# Altium PCB Cold_chain_Logger.PcbDoc (part 3 of 3)
Units mm, origin at the board's own origin, x right, y up, seen from the top; angles counter-clockwise.
Board outline 66 x 99 mm, 4 copper layers (Top Layer, GND Layer, 3.3V layer, Bottom Layer), stack 1.586 mm thick; 118 components, 83 nets, 435 pads, 406 vias.
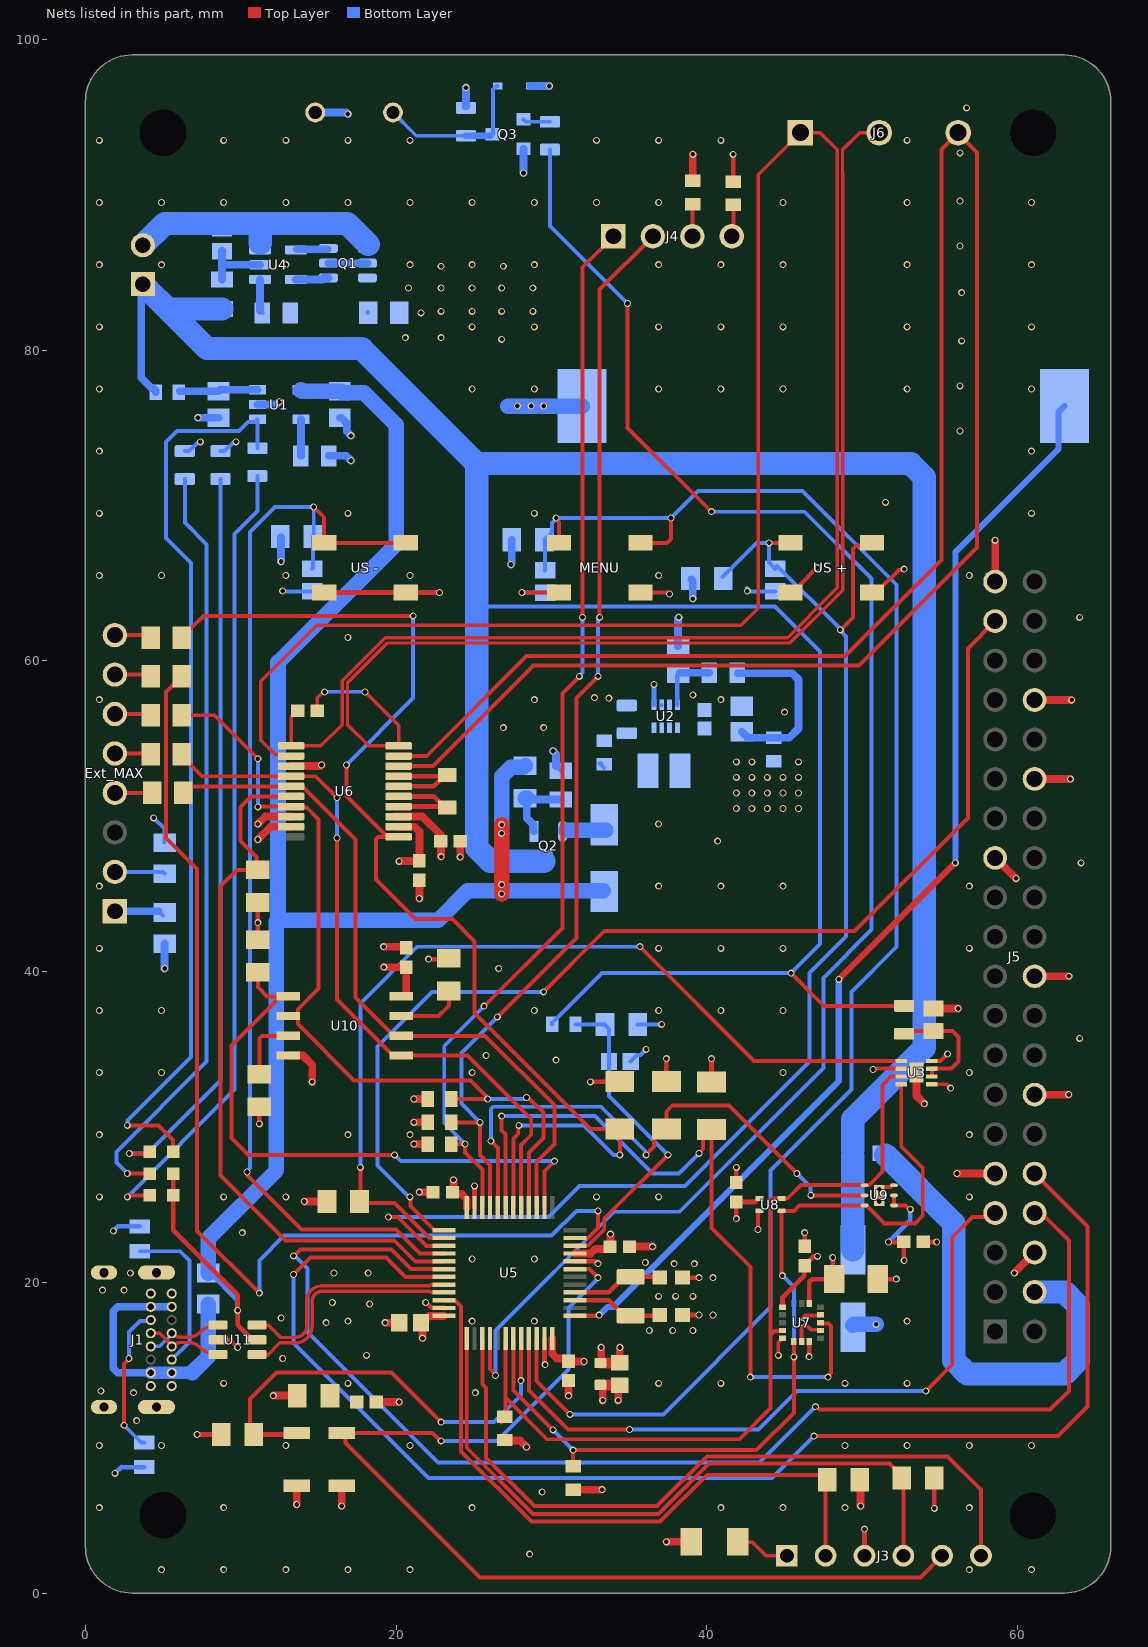
[diagram p4: the nets of this part, all layers, seen from the top]

## Via types
v1: diameter 0.45, hole 0.3, Top Layer to Bottom Layer, tented both sides, 403 vias
v2: diameter 0.5, hole 0.3, Top Layer to Bottom Layer, 2 vias
v3: diameter 0.45/0.45 (per signal layer), hole 0.3, Top Layer to Bottom Layer, tented both sides, 1 vias

## Nets (pads, with @x,y where several pads share a name; then routed paths per layer and width w, separated by ;. In a path a pad name is that pad's centre, name@x,y a point inside that pad or via, vN(x,y) a via of type N, cw(c..) or ccw(c..) an arc to the next point about the centre after c; other vN are vias at no path point)
3.3V: Boot0.2 C6.2 C7.2 C8.1 C9.2 C10.2 C14.2 C16.1 C17.1 C18.2 C20.1 C21.1 C23.1 C24.1 D2.2 LS.2 R3.2 R10.2 R11.2 R14.1 R15.2 R17.2 R21.2 R22.2 R23.2 R24.2 R29.2 R30.1 R31.2 R35.2 R36.2 R37.2 R45.1 R47.2 R54.2 R55.2 R56.2 R57.2 R65.2 U2.5 U5.9 U5.24 U5.36 U5.48 U6.2 U6.3 U7.1 U7.8 U7.14 U8.3 U9.1 U9.2 U10.8 | length 83.3
  Top Layer w0.254: U10.8@20.345,38.405 20.523,38.405 U10.8@20.662,38.544 ; U5.36@23.071,17.837 U5.36@23.084,17.85 ; R30.1@34.375,32.9 R30.1@34.4,32.925 ; U7.14@46.6,18.625 U7.14@46.6,18.675 ; R24.2@49.85,7.3 R24.2@49.9,7.25 ; U9.1@52.05,24.95 U9.2@52.05,25.6 ; U9.1@52.173,24.95 52.797,24.95 53.047,24.7 v1(53.1,24.7)
  Top Layer w0.3: R36.2@11.1,42.05 v1(11.1,43.15) 11.1,44.35 R65.2@11.2,44.45 ; v1(11.2,30.2) R35.2@11.2,31.3 ; v1(22.1,40.8) 23.35,40.8 R37.2@23.4,40.85 ; v1(32.5,32.9) R30.1@34.375,32.9 ; R47.2@37.4,32.925 v1(37.4,34.4) ; R45.1@40.3,32.9 v1(40.3,34.4) ; v1(41.9,24.1) C23.1@41.9,25.175 43.124,25.175 43.3,25.35 43.3,25.4 U8.3@43.4,25.4 ; U7.1@44.875,18.4 44.875,19.025 46.265,20.415 C21.1@46.265,21.039 ; C21.1@46.3,21.075 46.3,21.096 46.875,21.671 v1(47.121,21.671) ; v1(46.587,15.212) 46.587,16.163 U7.8@46.6,16.175 ; U7.14@46.6,18.675 46.6,20.024 46.776,20.2 C20.1@48.2,20.2 ; v1(48.1,21.6) 48.1,20.393 C20.1@48.193,20.3 ; v1(51.7,22.6) C24.1@52.675,22.6 52.687,22.587 52.687,21.413 v1(52.7,21.4)
  Top Layer w0.5: v1(12.1,12.708) 13.3,12.708 13.65,12.358 R23.2@13.65,12.3 ; v1(13.6,5.7) Boot0.2@13.6,6.9 ; v1(14.1,25.2) R14.1@15.55,25.2 ; v1@19.2,40.3 v1(19.213,40.287) C18.2@20.662,40.287 U10.8@20.662,38.544 ; U6.3@19.918,49.975 U6.3@20.16,49.975 21.7,49.975 22.9,48.775 v1(22.9,47.4) ; U6.2@20.16,49.325 21.207,49.325 21.5,49.032 C16.1@21.5,47.125 20.225,47.125 v1(20.2,47.1) ; v1(21.15,28.9) R11.2@22.05,28.9 ; v1(21.15,30.3) R10.2@22.05,30.3 ; v1(21.15,31.8) R29.2@22.05,31.8 ; C10.2@21.6,17.4 21.7,17.3 v1(21.7,16.4) ; C10.2@21.937,17.663 22.112,17.837 U5.36@23.071,17.837 ; C7.2@23.625,25.8 23.818,25.8 23.924,25.694 24.207,25.694 24.55,25.351 U5.24@24.55,24.816 ; C7.2@23.7,26.037 v1(23.7,26.6) ; R21.2@27,9.85 27.037,9.813 27.987,9.813 v1(28.4,9.4) ; U5.48@30.05,16.384 30.05,15.396 30.343,15.103 30.944,15.103 31.1,14.947 C8.1@31.1,14.925 ; C8.1@31.325,14.9 v1(32.1,14.9) ; R22.2@31.4,6.65 v1(33.25,6.65) ; U5.9@31.516,21.85 31.527,21.86 32.535,21.86 32.819,22.144 33.618,22.144 C14.2@33.775,22.3 ; v1(33.2,15.8) 33.2,14.825 C6.2@33.212,14.813 ; C14.2@33.796,22.3 33.8,22.304 v1(33.8,23.1) ; C9.2@34.4,14.825 v1(34.4,15.8) ; v1(37.4,3.3) R15.2@39,3.3 ; R17.2@39.1,90.9 v1(39.1,92.6) ; v1(49.9,5.6) R24.2@49.9,7.25
  Top Layer w0.7: C6.2@33.162,14.813 33.212,14.813 C9.2@34.188,14.813
  Bottom Layer w0.254: R56.2@12.55,68 R56.2@12.6,67.95 ; R57.2@24.445,95.645 R57.2@24.5,95.59 ; R55.2@38.95,65.3 R55.2@39,65.25
  Bottom Layer w0.3: U2.5@36.6,57.17 v1(36.6,58.485) ; v1(51.7,22.6) 53.1,24 v1(53.1,24.7)
  Bottom Layer w0.4: R57.2@24.445,95.645 R57.2@24.5,95.7
  Bottom Layer w0.5: v1(5.1,40.2) R31.2@5.1,41.8 ; v1(12.6,66.4) R56.2@12.6,67.95 ; LS.2@14.8,95.3 16.8,95.3 v1(16.9,95.2) ; R57.2@24.5,95.7 v1(24.5,96.9) ; v1(27.4,66.2) 27.45,66.25 R54.2@27.45,67.8 ; D2.2@28.655,97 v1(29.862,97) ; R55.2@39,65.25 39.1,65.15 v1(39.1,64)
  other v1: 41.9,50.5 42.9,50.5 43.9,50.5 44.9,50.5 45.9,50.5 41.9,51.5 42.9,51.5 43.9,51.5 44.9,51.5 45.9,51.5 41.9,52.5 42.9,52.5 43.9,52.5 44.9,52.5 45.9,52.5 41.9,53.5 42.9,53.5 45.9,53.5
5V: C3.2 D1.2 DS1.1 DS2.1 R12.2 R28.2 U1.4 U11.5@11.055,16.3 | length 114.6
  Top Layer w0.3: DS2.1@5.65,27 DS1.1@5.65,25.6 5.65,23.35 9.8,19.2 v1(9.8,18.2) 9.8,17.245 U11.5@10.745,16.3
  Top Layer w1: v1(26.8,45) v1(26.8,45.6) v1(26.8,48.9) v1(26.8,49.456)
  Bottom Layer w0.3: R12.2@7.9,20.6 8.025,20.6 9.771,18.854 9.771,18.229 v1(9.8,18.2)
  Bottom Layer w1: R12.2@7.9,20.6 7.9,22.8 12.3,27.2 12.3,43.2 12.4,43.3 ; U1.4@13.875,77.45 13.875,77.4 13.925,77.35 C3.2@16.375,77.35 16.475,77.35 16.575,77.25 17.95,77.25 20,75.2 20,67.5 12.4,59.9 12.4,43.3 ; 26.6,45.2 24.6,45.2 22.7,43.3 12.4,43.3 ; v1(26.8,45) v1(26.8,45.6) ; v1(26.8,48.9) v1(26.8,49.456) 26.8,52.564 27.386,53.15 28.2,53.15 R28.2@28.3,53.25 ; 27,45.2 D1.2@33.35,45.2
+_int: "US +.1" "US +.2" C26.2 R55.1 U5.27 | length 84.4
  Top Layer w0.254: v1(19.5,24.2) 19.506,24.194 20.106,24.194 21.95,22.35 U5.27@23.084,22.35 ; v1(44,67.6) 45.375,67.6 ; v1(48.6,62) 49.4,62.8 49.4,67.2 49.618,67.418 50.443,67.418 50.625,67.6
  Bottom Layer w0.254: v1(19.5,24.2) 29.8,24.2 31.8,26.2 38.6,26.2 46.6,34.2 46.6,39.9 48.965,42.265 48.965,61.582 48.6,61.947 v1(48.6,62) 48.6,62.05 C26.2@44.533,66.117 ; R55.1@41,65.4 43.2,67.6 v1(44,67.6) 44,66.323 44.398,65.925 C26.2@44.4,65.925
-_int: "US -.1" "US -.2" C27.2 R56.1 U5.28 | length 72.9
  Top Layer w0.254: v1(10.4,27.1) 10.438,27.062 10.438,26.862 13.9,23.4 20,23.4 21.55,21.85 U5.28@23.084,21.85 ; v1(14.7,69.9) 15.375,69.225 15.375,67.6 20.625,67.6
  Bottom Layer w0.254: v1(10.4,27.1) 10.4,27.147 10.6,27.347 10.6,68.3 12.2,69.9 v1(14.7,69.9) 14.7,68 R56.1@14.65,68 14.65,65.975 C27.2@14.6,65.925
B+: BAT.1 C28.1 Q2.3 R2.2 R9.2 R18.2 R43.1 R64.2 | length 215.8
  Top Layer w0.254: v1(45.417,39.9) 47.527,37.79 R9.2@52.7,37.79
  Bottom Layer w0.254: 25.2,63.5 44.4,63.5 47.3,60.6 47.3,41.783 v1(45.417,39.9) 33.25,39.9 30.05,36.7 R18.2@30.05,36.6
  Bottom Layer w0.5: 3.6,83.379 3.6,78.225 4.275,77.55 4.375,77.55 4.525,77.4 R2.2@4.525,77.3
  Bottom Layer w1.5: BAT.1@3.725,84.225 4.086,83.864 5.301,82.649 ; R43.1@8.8,82.649 5.301,82.649 ; 29.5,47.1 26.079,47.1 25.2,47.979 25.2,63.5 25.2,72.7 ; C28.1@49.4,22.1 R64.2@49.4,28.1 ; R64.2@49.4,28.5 49.4,30.5 54,35.1 54,71.821 53.121,72.7 25.2,72.7 ; 5.301,82.649 7.85,80.1 17.8,80.1 25.2,72.7
B-: BAT.2 C22.1 Q1.1 U4.3 | length 17.5
  Bottom Layer w0.254: C22.1@8.277,88.251 8.277,88.223 C22.1@8.675,87.825 ; 11.2,88.15 11.25,88.1
  Bottom Layer w1.5: BAT.2@3.7,86.75 5.1,88.15 8.277,88.15 11.2,88.15 16.85,88.15 Q1.1@18.2,86.8 ; 11.25,86.9 11.25,88.1
Battery: C15.2 R18.1 R20.2 U5.10 | length 20.8
  Top Layer w0.254: U5.10@31.516,22.35 31.529,22.363 32.363,22.363 33.4,23.4 33.4,24.1 v1(37.5,28.2)
  Bottom Layer w0.254: R18.1@31.55,36.6 R20.2@33.45,36.6 ; R20.2@33.4,36.6 33.7,36.3 C15.2@33.7,34.175 ; C15.2@33.7,34.2 33.7,32 v1(37.5,28.2)
Buzz: R58.2 U5.40 | length 106
  Top Layer w0.254: U5.40@26.05,16.384 26.05,14.403 26.4,14.053 v1(26.4,14) ; v1(34.9,83) 34.9,75 v1(40.3,69.6)
  Bottom Layer w0.254: v1(26.4,14) 26.4,16.9 34.044,24.544 38.244,24.544 47.5,33.8 47.5,39.6 50.6,42.7 50.6,65.3 46.3,69.6 v1(40.3,69.6) ; R58.2@29.9,92.91 29.9,88 v1(34.9,83)
DI_N: J1.A7 J1.B7 U11.1 | length 5
  Top Layer w0.222: J1.A7@5.56,16.725 5.606,16.679 ccw(c6.1,17.174) 6.1,16.475 6.673,16.475 ccw(c6.673,17.393) 7.323,16.744 cw(c8.545,15.521) U11.1@8.545,17.25
  Bottom Layer w0.222: J1.B7@4.21,15.875 4.802,15.875 5.56,16.633 J1.A7@5.56,16.725
DI_P: J1.A6 J1.B6 U11.3 | length 5
  Top Layer w0.222: J1.B6@4.21,16.725 4.802,16.725 5.56,15.967 J1.A6@5.56,15.875 5.606,15.921 cw(c6.1,15.426) 6.1,16.125 6.673,16.125 cw(c6.673,15.207) 7.323,15.856 ccw(c8.545,17.079) U11.3@8.545,15.35
Fuel_int: R14.2 U3.5 U5.26 | length 58.5
  Top Layer w0.254: R14.2@17.65,25.1 19.9,25.1 20.7,24.3 22.15,22.85 U5.26@23.084,22.85 ; R14.2@17.65,25.2 17.7,25.25 v1(17.7,27.4) ; v1(35.7,41.6) 43.05,34.25 U3.5@52.515,34.25
  Bottom Layer w0.254: v1(17.7,27.4) 17.7,37.95 21.35,41.6 v1(35.7,41.6)
GND: "US +.3" "US +.4" "US -.3" "US -.4" BT1.2 C1.1 C2.1 C3.1 C4.1 C5.1 C6.1 C7.1 C8.2 C9.1 C10.1 C11.2 C12.2 C13.2 C14.1 C15.1 C16.2 C17.2 C18.1 C20.2 C21.2 C23.2 C24.2 C25.1 C26.1 C27.1 C28.2 C29.1 J1.A1 J1.A12 J1.B1 J1.B12 J1.S1 J1.S2 J1.S3 J1.S4 J3.3 J5.06 J5.09 J5.14 J5.20 J5.25 J5.30 J5.34 J5.39 MENU.3 MENU.4 NRST.1 Q3.2 R5.1 R6.1 R7.1 R8.1 R13.1 R16.1 R20.1 R25.2 R26.1 R27.2 R32.2 R44.2 R48.1 U1.2 U2.6 U2.7 U3.1 U3.4 U3.6 U3.9 U5.8 U5.23 U5.35 U5.47 U6.13 U6.18 U6.19 U7.5 U7.7 U7.10 U7.12 U8.4 U9.3 U9.7 U10.4 U11.2 | length 127.7
  Top Layer w0.254: U11.2@8.545,16.3 9.3,16.3 v1(9.8,15.8) ; C18.1@20.6,41.6 C18.1@20.662,41.538 ; v1(28.1,64.4) MENU.3@30.475,64.4 ; C9.1@34.375,13.4 C9.1@34.4,13.375 ; MENU.4@35.725,64.4 37.447,64.4 37.547,64.3 v1(37.6,64.3) ; v1(43.3,23.4) 43.3,24.577 43.323,24.6 U8.4@43.4,24.6 ; v1(44.6,15.3) 44.6,16.125 44.777,16.302 44.777,16.352 44.825,16.4 U7.5@44.875,16.4 ; 45.375,64.4 45.65,64.4 46.023,64.773 46.023,64.923 v1(47.1,66) ; U7.7@46.1,16.175 v1(46.1,17.4) ; v1@46.1,17.6 46.35,17.85 46.923,17.85 46.934,17.861 47.286,17.861 U7.12@47.325,17.9 ; v1@46.191,17.4 46.191,17.362 46.251,17.302 46.298,17.302 46.3,17.3 46.349,17.3 46.701,16.948 47.277,16.948 U7.10@47.325,16.9 ; 50.625,64.4 50.9,64.4 52.362,65.862 52.662,65.862 v1(52.7,65.9) ; v1(50.7,33.7) 50.753,33.7 50.803,33.75 U3.6@52.515,33.75 ; v2(51.1,26) 51.248,26.148 51.827,26.148 51.929,26.25 U9.3@52.05,26.25 ; U3.1@54.485,32.75 55.45,32.75 v1(55.7,32.5) ; U3.4@54.485,34.25 55.05,34.25 v1(55.5,34.7) ; v1(56.175,37.625) v1@56.2,37.6 ; v1(58.56,67.76) v1@58.6,67.8 ; v1(59.8,20.6) v1@59.8,20.62 ; v1@63.28,32.08 v1(63.29,32.09) v1@63.3,32.1 ; v1@63.48,57.48 v1(63.49,57.49) v1@63.5,57.5
  Top Layer w0.3: v1(7.2,10.2) R26.1@8.75,10.2 ; 15.375,64.4 20.625,64.4 v1(22.8,64.4) ; v1(21.9,18.7) 21.941,18.7 22.28,18.36 23.073,18.36 U5.35@23.084,18.35 ; U5.23@25.05,24.816 v1(25.05,26.209) ; U5.47@29.55,16.384 29.55,14.791 29.6,14.741 v1(29.6,14.7) ; U5.8@31.516,21.35 32.809,21.35 32.959,21.2 v1(33,21.2) ; C13.2@38.427,17.9 v1(39.5,17.9) ; C11.2@38.427,20.3 v1(39.5,20.3) ; R27.2@41.7,90.85 v1(41.7,92.6) ; C23.2@41.9,26.425 v1(41.9,27.4) ; C21.2@46.3,22.325 v1(46.3,23.2) ; J3.3@50.15,2.4 v1(50.15,4.109) ; C20.2@51,20.2 v1(52.2,20.2) ; C24.2@53.925,22.6 v1(54.8,22.6) ; v1(54.65,5.45) R25.2@54.65,7.4
  Top Layer w0.5: v1(11.1,48.5) 11.925,49.325 U6.19@13.24,49.325 ; v1(11.1,49.5) 11.575,49.975 U6.18@13.24,49.975 ; U10.4@13.055,34.595 14.008,34.595 14.6,34.003 v1(14.6,32.9) ; U6.13@13.24,53.225 15.125,53.225 v1(15.2,53.3) ; v1(16.5,5.6) NRST.1@16.5,6.9 ; C12.2@18.725,12.3 v1(20.2,12.3) ; v1(19.2,41.6) C18.1@20.6,41.6 ; v1(19.3,17.4) C10.1@19.9,17.4 ; v1(21.5,25.8) C7.1@22.375,25.8 ; v1(21.5,44.7) C16.2@21.5,45.875 ; v1(24.125,47.375) C17.2@24.125,48.4 ; v1(31.1,12.7) C8.2@31.1,13.675 ; C6.1@33.15,13.4 33.2,13.4 C6.1@33.28,13.32 ; v1(33.3,12.4) C6.1@33.3,13.32 ; v1(34.3,12.4) C9.1@34.3,13.375 ; C14.1@35.025,22.3 v1(36.5,22.3) ; U3.9@53.5,33.5 53.5,32 v1(54,31.5) ; C5.1@54.6,37.625 v1(56.175,37.625) ; v1(56.1,27) J5.09@58.56,27 ; J5.25@58.56,47.32 59.88,46 v1(59.9,46) ; J5.39@58.56,65.1 v1(58.56,67.76) ; v1@59.8,20.62 J5.06@61.1,21.92 ; J5.14@61.1,32.08 v1@63.28,32.08 ; J5.20@61.1,39.7 v1(63.3,39.7) ; J5.30@61.1,52.4 v1(63.4,52.4) ; J5.34@61.1,57.48 v1@63.48,57.48
  Top Layer w0.7: C6.1@33.4,13.4 C9.1@34.175,13.4
  Bottom Layer w0.254: J1.B1@4.21,19.275 J1.B1@4.21,19.382 ; v1(4.4,49.9) 5.1,49.2 R32.2@5.1,48.3 ; R6.1@6.4,73.5 6.67,73.5 7.27,74.1 v1(7.4,74.1) ; R7.1@8.7,73.5 8.97,73.5 9.57,74.1 v1(9.7,74.1) ; v1(12.7,64.5) 12.725,64.475 C27.1@14.6,64.475 ; v1(28.1,64.4) 29.575,64.4 C25.1@29.6,64.375 ; R48.1@30.3,53.225 R48.1@30.6,52.925 ; C15.1@35.1,34.2 35.1,34.225 35.498,34.623 35.723,34.623 v1(36.1,35) ; R20.1@35.55,36.6 v1(37.1,36.6) ; U2.6@37.067,57.137 U2.6@37.1,57.17 ; v1@42.6,64.7 v1@42.625,64.675 ; v1@42.625,64.475 C26.1@44.4,64.475
  Bottom Layer w0.3: v1(1.8,23.3) 2.101,23.601 R13.1@3.5,23.601 ; v1(1.9,7.7) 2.299,8.099 R16.1@3.8,8.099
  Bottom Layer w0.5: v1(7.25,75.65) C4.1@8.575,75.65 ; U1.2@11.075,76.5 12.3,76.5 v1(12.475,76.675) ; R8.1@15.675,73.2 16.8,73.2 v1(17.1,72.9) ; C3.1@16.375,75.65 16.475,75.65 16.825,75.3 16.825,74.775 v1(17.1,74.5) ; v1(28.2,91.4) Q3.2@28.2,92.95 ; v1(30.1,54.2) 30.3,54 R48.1@30.3,53.225 ; R5.1@38.15,60.96 38.15,62.75 v1(38.2,62.8)
  Bottom Layer w1: 27.2,76.4 v1(27.8,76.4) v1(28.7,76.4) v1(29.5,76.4) BT1.2@31.98,76.4 ; C28.2@49.4,17.227 49.473,17.3 v1(50.9,17.3)
  other v1: 4.9,1.5 8.9,1.5 12.9,1.5 16.9,1.5 20.9,1.5 56.9,1.5 60.9,1.5 28.6,2.5 0.9,5.5 8.9,5.5 24.9,5.5 40.9,5.5 44.9,5.5 48.9,5.5 56.9,5.5 0.9,9.5 4.9,9.5 12.9,9.5 20.9,9.5 48.9,9.5 52.9,9.5 56.9,9.5 60.9,9.5 3.3,11.1 3.1,12.9 25.1,12.9 1,13 8.9,13.5 16.9,13.5 36.9,13.5 40.9,13.5 48.9,13.5 52.9,13.5 12.7,15.1 18.1,15.3 36.3,16.9 37.8,16.9 39.1,16.9 15.5,17.4 16.9,17.5 24.9,17.5 28.9,17.5 52.9,17.5 12.6,17.7 40.4,17.9 18.3,18.6 15.9,18.7 36.9,19.1 38,19.1 39.1,19.1 1.1,19.5 2.5,19.5 40.4,20.3 2.9,20.6 16,20.6 18.2,20.6 37.9,21.2 39.2,21.2 36.047,21.275 24.9,21.5 28.9,21.5 10.1,23.2 0.9,25.5 8.9,25.5 12.9,25.5 32.9,25.5 36.9,25.5 56.9,25.5 0.9,29.5 16.9,29.5 20.9,29.5 56.9,29.5 0.9,33.5 4.9,33.5 24.9,33.5 44.9,33.5 56.9,33.5 30.3,34.3 25.8,34.6 64,35.7 0.9,37.5 4.9,37.5 28.9,37.5 36.9,37.5 40.9,37.5 44.9,37.5 26.6,40.2 0.9,41.5 36.9,41.5 40.9,41.5 44.9,41.5 56.9,41.5 0.9,45.5 36.9,45.5 40.9,45.5 44.9,45.5 56.9,45.5 64.1,47 40.7,48.4 36.9,49.5 26.9,55.7 29.5,55.7 45,56.7 0.9,57.5 28.9,57.5 40.9,57.5 33.7,57.6 32.773,57.627 39.1,57.8 16.9,61.5 64,62.8 42.613,64.488 0.9,65.5 4.9,65.5 12.9,65.5 20.9,65.5 36.9,65.5 56.9,65.5 0.9,69.5 16.9,69.5 28.9,69.5 60.9,69.5 51.5,70.2 0.9,73.5 60.9,73.5 56.3,74.8 0.9,77.5 24.9,77.5 28.9,77.5 36.9,77.5 40.9,77.5 44.9,77.5 52.9,77.5 60.9,77.5 56.3,77.7 56.4,80.6 26.8,80.7 20.6,80.8 22.9,80.8 0.9,81.5 24.9,81.5 28.9,81.5 36.9,81.5 40.9,81.5 44.9,81.5 52.9,81.5 60.9,81.5 21.6,82.4 22.9,82.5 24.9,82.5 26.8,82.5 28.8,82.5 56.4,83.7 20.8,84 22.9,84 24.9,84 26.8,84 28.8,84 22.9,85.4 26.9,85.4 0.9,85.5 4.9,85.5 12.9,85.5 20.9,85.5 24.9,85.5 28.9,85.5 36.9,85.5 40.9,85.5 44.9,85.5 52.9,85.5 60.9,85.5 56.3,86.7 0.9,89.5 4.9,89.5 8.9,89.5 12.9,89.5 16.9,89.5 20.9,89.5 24.9,89.5 28.9,89.5 32.9,89.5 36.9,89.5 44.9,89.5 52.9,89.5 60.9,89.5 56.3,89.6 56.3,92.7 0.9,93.5 8.9,93.5 12.9,93.5 16.9,93.5 20.9,93.5 32.9,93.5 36.9,93.5 40.9,93.5 52.9,93.5 56.722,95.6
  other v2: 51.1,25.2
  other v3: 29.4,6.5
GSM_EN: J5.07 U5.45 | length 45
  Top Layer w0.254: U5.45@28.55,16.384 28.55,13.05 31.075,10.525 v1(35.025,10.525) ; v1(54.1,13) 55.8,14.7 55.8,22.9 57.116,24.216 58.316,24.216 J5.07@58.56,24.46
  Bottom Layer w0.254: v1(35.025,10.525) 43.325,10.525 45.8,13 v1(54.1,13)
GSM_status: J5.37 U5.25 | length 71.5
  Top Layer w0.254: v1(20.9,25.5) 20.938,25.462 20.938,24.899 22.487,23.35 U5.25@23.084,23.35 ; v1(29.5,38.7) 33.4,42.6 49.5,42.6 56.8,49.9 56.8,60.8 J5.37@58.56,62.56
  Bottom Layer w0.254: v1(20.9,25.5) 20.847,25.5 20.749,25.598 20.727,25.598 18.8,27.525 18.8,35.184 22.316,38.7 v1(29.5,38.7)
IMU_int: R45.2 U5.19 U7.11 | length 48.6
  Top Layer w0.254: v1(26.8,30.698) 26.8,29.773 27.038,29.535 U5.19@27.038,24.828 ; v1(39.5,28.3) 39.766,28.566 39.766,29.302 39.962,29.498 R45.2@40.298,29.498 ; 40.298,28.898 R45.2@40.298,29.498 ; 40.3,28.898 40.3,23.5 42.8,21 v1(42.8,13.9) ; R45.2@40.3,29.85 40.298,29.848 R45.2@40.298,29.498 ; U7.11@47.325,17.4 47.373,17.352 47.848,17.352 48,17.2 48,14.147 47.8,13.947 v1(47.8,13.9)
  Bottom Layer w0.254: v1(26.8,30.698) 32.802,30.698 36.5,27 38.2,27 v1(39.5,28.3) ; v1(42.8,13.9) v1(47.8,13.9)
Light_int: R47.1 U5.20 U9.5 | length 37.1
  Top Layer w0.254: v1(26.1,29.1) 26.55,28.65 U5.20@26.55,24.816 ; v1(36.1,28.2) 36.1,28.233 36.602,28.735 36.602,29.327 37.15,29.875 R47.1@37.4,29.875 37.4,31 37.775,31.375 41.425,31.375 v1(45.8,27) ; v1(46.7,25.6) U9.5@50.15,25.6
  Bottom Layer w0.254: v1(26.1,29.1) 26.1,31.151 26.249,31.3 33.2,31.3 36.062,28.438 36.062,28.238 v1(36.1,28.2) ; v1(45.8,27) 46.662,26.138 46.662,25.638 v1(46.7,25.6)
Max_2_CS: R40.2 U5.11 | length 70.8
  Top Layer w0.254: R40.2@6.2,59 6.2,58.875 5.727,58.402 5.602,58.402 5.2,58 5.2,48.6 7.2,46.6 7.2,23.3 v1(11.2,19.3) ; U5.11@31.516,22.85 31.529,22.863 32.362,22.863 33,23.501 v1(33,24.6)
  Bottom Layer w0.254: v1(11.2,19.3) 11.2,21.4 12.8,23 30,23 31.6,24.6 v1(33,24.6)
Max_CS: R65.1 U5.29 U6.16 | length 46.3
  Top Layer w0.254: U6.16@13.24,51.275 10.675,51.275 10,50.6 10,48.4 11.018,47.382 11.018,46.732 11.125,46.625 11.2,46.55 9.75,46.55 8.7,45.5 8.7,26.883 12.883,22.7 19.883,22.7 21.233,21.35 U5.29@23.084,21.35
Menu_int: C25.2 MENU.1 MENU.2 R54.1 U5.46 | length 105.3
  Top Layer w0.254: U5.46@29.05,16.384 29.05,13.65 v1(31.2,11.5) ; v1(30.3,69.2) 30.3,69.147 30.5,68.947 30.5,67.625 MENU.1@30.475,67.6 ; MENU.2@35.725,67.6 37.447,67.6 37.7,67.853 v1(37.7,69.2)
  Bottom Layer w0.254: C25.2@29.6,65.825 29.6,67.75 R54.1@29.55,67.8 30.023,68.273 30.023,68.87 30.3,69.147 v1(30.3,69.2) v1(37.7,69.2) 39.43,70.93 46.17,70.93 52.2,64.9 52.2,41.6 49.3,38.7 49.3,32.4 44.1,27.2 44.1,18.4 37.2,11.5 v1(31.2,11.5)
NetBoot0_1: Boot0.1 R26.2 U5.44 | length 28.9
  Top Layer w0.254: R26.2@10.85,10.2 10.6,10.45 10.6,12.5 12.3,14.2 19.7,14.2 v1(22.9,11) ; v1(28.031,13.669) 28.04,13.679 28.04,16.374 U5.44@28.05,16.384
  Top Layer w0.3: R26.2@10.85,10.2 12.051,10.2 Boot0.1@13.5,10.2
  Bottom Layer w0.254: v1@22.901,10.999 26.299,10.999 28.031,12.731 v1(28.031,13.669)
NetBT1_1: BT1.1 U5.1 | length 72.7
  Top Layer w0.3: U5.1@31.516,17.85 32.996,17.85 33.034,17.888 v1(33.075,17.888)
  Top Layer w0.4: v1(48.5,39.5) v1(56,47)
  Bottom Layer w0.4: v1(33.075,17.888) 33.089,17.888 33.607,18.407 33.957,18.407 48.5,32.95 v1(48.5,39.5) ; v1(56,47) 56,67 62.644,73.644 62.644,76.024 BT1.1@63.02,76.4
NetC2_2: C2.2 C29.2 R3.1 R4.2 U2.1 | length 11.3
  Bottom Layer w0.254: R4.2@41.95,59.235 R4.2@41.985,59.2
  Bottom Layer w0.5: R4.2@41.985,59.2 45.5,59.2 45.9,58.8 45.9,55.646 45.304,55.05 R3.1@44.3,55.05 42.635,55.05 42.627,55.058 42.424,55.261 C2.2@42.25,55.435
NetC4_2: C4.2 R2.1 U1.3 | length 5.1
  Bottom Layer w0.254: R2.1@6.025,77.3 R2.1@6.075,77.35 ; C4.2@8.575,77.35 C4.2@8.675,77.45
  Bottom Layer w0.5: R2.1@6.075,77.35 C4.2@8.575,77.35 ; C4.2@8.675,77.45 U1.3@11.075,77.45
NetC5_2: C5.2 R9.1 U3.2 U3.3 | length 7.6
  Top Layer w0.254: R9.1@52.8,35.9 R9.1@52.975,36.075 ; R9.1@52.975,36.175 C5.2@54.6,36.175 55.825,36.175 56.2,35.8 56.2,34.2 55.75,33.75 U3.3@54.485,33.75 U3.2@54.485,33.25
NetC11_1: C11.1 U5.4 Y1.2 | length 5.5
  Top Layer w0.254: C11.1@36.923,20.35 C11.1@36.973,20.3
  Top Layer w0.3: U5.4@31.516,19.35 33.7,19.35 Y1.2@34.7,20.35 ; Y1.2@35.1,20.35 C11.1@36.923,20.35
NetC13_1: C13.1 U5.3 Y1.1 | length 5.5
  Top Layer w0.254: C13.1@36.923,17.85 C13.1@36.973,17.9
  Top Layer w0.3: U5.3@31.516,18.85 33.7,18.85 Y1.1@34.7,17.85 ; Y1.1@35.1,17.85 C13.1@36.923,17.85
NetC22_2: C22.2 R43.2 U4.2 | length 4.3
  Bottom Layer w0.5: R43.2@8.8,84.551 8.8,85.5 ; C22.2@8.8,86.375 8.8,85.5 ; U4.2@11.25,85.5 8.8,85.5
NetD1_1: D1.1 Q2.2 R49.1 | length 3.1
  Bottom Layer w0.254: R49.1@33.2,53.4 33.1,53.4 R49.1@33.4,53.1 ; D1.1@33.377,49.427 D1.1@33.4,49.45
  Bottom Layer w1: Q2.2@30.923,49.1 D1.1@33.5,49.1
NetD2_1: D2.1 LS.1 Q3.3 R57.1 | length 10.2
  Bottom Layer w0.254: LS.1@19.8,95.3 21.3,93.8 R57.1@24.5,93.8 ; Q3.3@26.25,93.9 26.25,96.775 26.475,97 D2.1@26.545,97
  Bottom Layer w0.4: R57.1@24.5,93.8 Q3.3@26.1,93.8
NetDS1_2: DS1.2 R1.1 | length 51.4
  Top Layer w0.254: v1(2.7,25.5) 2.753,25.5 2.853,25.6 DS1.2@4.15,25.6
  Bottom Layer w0.254: v1(2.7,25.5) 9.6,32.4 9.6,68.171 11.075,69.646 R1.1@11.075,71.9
NetDS2_2: DS2.2 R6.2 | length 49.4
  Top Layer w0.254: v1(2.7,27) DS2.2@4.15,27
  Bottom Layer w0.254: v1(2.7,27) 2,27.7 2,28.4 7.8,34.2 7.8,67.5 6.4,68.9 R6.2@6.4,71.71
NetDS3_1: DS3.1 R1.2 U1.1 | length 58.8
  Top Layer w0.254: v1(2.7,30.1) 4.7,30.1 5.65,29.15 DS3.1@5.65,28.4
  Bottom Layer w0.254: v1(2.7,30.1) 2.725,30.125 2.725,30.425 6.8,34.5 6.8,66.3 5.2,67.9 5.2,74.1 5.9,74.8 9.9,74.8 10.477,75.377 10.902,75.377 U1.1@11.075,75.55 R1.2@11.075,73.69
NetDS3_2: DS3.2 R7.2 | length 47.9
  Top Layer w0.254: v1(2.835,28.296) 4.046,28.296 DS3.2@4.15,28.4
  Bottom Layer w0.254: v1(2.835,28.296) 3.996,28.296 8.7,33 R7.2@8.7,71.71
NetExt_MAX_1: Ext_MAX.1 R31.1 | length 3.2
  Bottom Layer w0.254: R31.1@4.72,43.88 R31.1@5,43.6
  Bottom Layer w0.5: Ext_MAX.1@1.9,43.88 R31.1@4.72,43.88
NetExt_MAX_2: Ext_MAX.2 R32.1 | length 3.2
  Bottom Layer w0.254: Ext_MAX.2@1.9,46.42 4.98,46.42 R32.1@5.1,46.3
NetExt_MAX_4: Ext_MAX.4 R33.1 | length 2.4
  Top Layer w0.254: Ext_MAX.4@1.9,51.5 R33.1@4.3,51.5
NetExt_MAX_5: Ext_MAX.5 R38.1 | length 2.3
  Top Layer w0.254: Ext_MAX.5@1.9,54.04 4.16,54.04 R38.1@4.2,54
NetExt_MAX_6: Ext_MAX.6 R39.1 | length 2.3
  Top Layer w0.254: Ext_MAX.6@1.9,56.58 4.12,56.58 R39.1@4.2,56.5
NetExt_MAX_7: Ext_MAX.7 R40.1 | length 2.3
  Top Layer w0.254: Ext_MAX.7@1.9,59.12 4.08,59.12 R40.1@4.2,59
NetExt_MAX_8: Ext_MAX.8 R41.1 | length 2.4
  Top Layer w0.254: Ext_MAX.8@1.9,61.66 4.04,61.66 R41.1@4.2,61.5
NetJ1_A4: J1.A4 J1.A9 J1.B4 J1.B9 R12.1 | length 17.6
  Bottom Layer w0.5: J1.B4@4.169,18.425 J1.A9@5.56,18.425 ; J1.B9@4.21,14.175 2.093,14.175 1.8,14.468 1.8,18.132 2.093,18.425 J1.B4@4.21,18.425
  Bottom Layer w0.8: J1.B9@4.21,14.175 6.875,14.175
  Bottom Layer w1: 6.875,14.175 7.9,15.2 R12.1@7.9,18.6
NetJ1_A5: J1.A5 R13.2 | length 10.3
  Bottom Layer w0.254: R13.2@3.5,21.999 6.101,21.999 6.7,21.4 6.7,16.165 J1.A5@5.56,15.025
NetJ1_B5: J1.B5 R16.2 | length 9.6
  Top Layer w0.254: v1(2.5,10.8) 2.5,14.747 2.8,15.047 v1(2.8,15.1)
  Bottom Layer w0.254: v1(2.5,10.8) 3.598,9.701 R16.2@3.8,9.701 ; v1(2.8,15.1) 2.8,16.8 3.504,17.504 4.139,17.504 J1.B5@4.21,17.575
NetJ3_1: J3.1 R15.1 | length 3.5
  Top Layer w0.254: R15.1@42,3.3 42.032,3.268 42.932,3.268 43.8,2.4 J3.1@45.15,2.4
NetJ4_3: J4.3 R17.1 | length 2.1
  Top Layer w0.254: J4.3@39.07,87.327 39.07,89.37 R17.1@39.1,89.4
NetJ4_4: J4.4 R27.1 | length 2.1
  Top Layer w0.254: R27.1@41.5,89.35 41.71,89.14 J4.4@41.71,87.328
NetJ5_04: J5.04 R64.1 | length 30.8
  Bottom Layer w0.254: R64.1@51.05,28.3 51.15,28.3 R64.1@51.15,28.1
  Bottom Layer w1.5: 51.5,28.2 55.9,23.8 55.9,14.979 56.779,14.1 63.021,14.1 63.9,14.979 63.9,18.501 63.021,19.38 J5.04@61.1,19.38
NetJ6_3: J6.3 U6.8 U6.9 | length 138.5
  Top Layer w0.254: U6.8@20.16,53.225 22.375,53.225 28.85,59.7 49.8,59.7 57.4,67.3 57.4,92.719 56.245,93.874 56.245,94.065 55.1,92.92 55.1,66.5 48.9,60.3 28.4,60.3 21.975,53.875 U6.9@20.16,53.875
NetL1_1: L1.1 U2.3
NetL1_2: L1.2 U2.2
NetQ1_2: Q1.2 Q1.5 | length 2.5
  Bottom Layer w0.5: Q1.5@15.645,85.6 Q1.2@18.155,85.6
NetQ1_3: Q1.3 R42.2 R44.1 | length 0.1
  Bottom Layer w0.254: R44.1@18.155,82.445 R44.1@18.2,82.4
NetQ1_4: Q1.4 U4.5 | length 2.1
  Bottom Layer w0.5: U4.5@13.55,84.55 15.235,84.55 15.335,84.65 Q1.4@15.645,84.65
NetQ1_6: Q1.6 U4.4 | length 2.1
  Bottom Layer w0.254: U4.4@13.55,86.45 U4.4@13.6,86.5 ; Q1.6@15.595,86.5 Q1.6@15.645,86.55
  Bottom Layer w0.5: U4.4@13.6,86.5 Q1.6@15.595,86.5
NetQ2_1: Q2.1 R28.1 R48.2 | length 4.2
  Bottom Layer w0.5: R28.1@28.411,51.039 28.411,49.886 28.842,49.456 28.842,49.07 Q2.1@28.885,49.027 ; R28.1@28.73,51.075 R48.2@30.6,51.075
  Bottom Layer w1: R28.1@28.3,51.15 R28.1@28.445,51.15
NetQ3_1: Q3.1 R58.1 | length 1.8
  Bottom Layer w0.254: Q3.1@28.2,94.85 28.35,94.7 R58.1@29.9,94.7
NetR4_1: R4.1 R5.2 U2.8 | length 4
  Bottom Layer w0.254: R5.2@38.1,59.06 R5.2@38.15,59.11 R5.2@38.275,59.235
  Bottom Layer w0.3: U2.8@38.1,57.17 R5.2@38.1,59.06
  Bottom Layer w0.5: R5.2@38.275,59.235 R4.1@40.15,59.235
NetR8_2: R8.2 U1.5 | length 2.4
  Bottom Layer w0.5: R8.2@13.875,73.2 U1.5@13.875,75.55
NetR34_1: R34.1 U6.6 U6.7 | length 6.5
  Top Layer w0.254: R34.1@23.15,52.65 R34.1@23.3,52.65
  Top Layer w0.3: U6.6@20.16,51.925 22.425,51.925 R34.1@23.15,52.65 ; U6.7@20.16,52.575 R34.1@23.225,52.575
NetR34_2: R34.2 U6.4 U6.5 | length 6.5
  Top Layer w0.254: R34.2@23.15,50.55 R34.2@23.3,50.55
  Top Layer w0.3: U6.4@20.16,50.625 R34.2@23.225,50.625 ; U6.5@20.16,51.275 22.425,51.275 R34.2@23.15,50.55
NetR35_1: R35.1 U10.3 | length 4.2
  Top Layer w0.254: R35.1@11.2,33.4 11.2,35.7 11.365,35.865 U10.3@13.055,35.865
NetR37_1: R37.1 U10.7 | length 4.3
  Top Layer w0.254: U10.7@20.345,37.135 22.735,37.135 23.4,37.8 R37.1@23.4,38.75
NetR42_1: R42.1 U4.1 | length 2.2
  Bottom Layer w0.254: R42.1@11.25,82.55 R42.1@11.4,82.4
  Bottom Layer w0.5: R42.1@11.25,82.55 U4.1@11.25,84.55
NRST: C12.1 J3.5 NRST.2 R23.1 U5.7 | length 68.5
  Top Layer w0.254: C12.1@17.453,12.3 C12.1@17.475,12.3 ; v1(22.9,9.8) 22.847,9.8 22.347,10.3 NRST.2@16.5,10.3 16.732,10.068 16.732,9.668 25.4,1 53.75,1 J3.5@55.15,2.4 ; U5.7@31.516,20.85 32.458,20.85 32.607,20.701 32.607,20.693 v1(33,20.3)
  Bottom Layer w0.254: v1(22.9,9.8) 26.5,9.8 31.1,14.4 31.1,18.347 33,20.247 v1(33,20.3)
RTD_N: C19.1 J6.1 U6.11 U6.12 | length 146.4
  Top Layer w0.222: U6.12@13.24,53.875 13.157,53.958 12.242,53.958 11.3,54.9 11.3,58.7 14.9,62.3 42.2,62.3 43.3,63.4 43.3,91.28 J6.1@46.02,94 47.285,94 48.385,92.9 48.385,91.5 ; C19.1@13.675,56.8 13.653,56.8 13.24,56.387 U6.11@13.24,54.525 15.15,54.525 16.525,55.9 16.525,58.725 19.3,61.5 45.2,61.5 47.985,64.285 48.4,64.7 48.4,91.5
RTD_P: C19.2 J6.2 U6.10 | length 80.5
  Top Layer w0.222: C19.2@14.925,56.8 14.925,57.625 15.3,58 v1(15.4,58) ; v1(18,58) 20.16,55.84 U6.10@20.16,54.525 18.25,54.525 16.875,55.9 16.875,58.581 19.445,61.151 45.345,61.151 48.232,64.039 48.335,64.141 48.749,64.555 48.749,91.355 48.735,91.37 48.735,92.9 49.835,94 J6.2@51.1,94
  Bottom Layer w0.222: v1(15.4,58) v1(18,58)
SCL1: R21.1 U3.7 U5.42 U7.4 U8.2 U9.4 | length 53.7
  Top Layer w0.254: R21.1@26.777,10.991 26.777,11.05 27.05,11.323 27.05,12.576 ; U5.42@27.05,16.384 27.05,12.755 27.05,12.576 ; U7.4@44.875,16.9 44.777,16.852 44.457,16.852 ccw(c44.457,16.598) 44.278,16.778 44.1,16.6 ; U3.7@52.515,33.25 52.507,33.242 51.842,33.242 51.3,32.7 51.3,27.121 50.681,26.502 50.429,26.25 46.05,26.25 45.274,25.474 cw(c45.095,25.654) 45.095,25.4 U8.2@44.8,25.4 44.354,25.4 ccw(c44.354,25.146) 44.1,25.146 44.1,16.6 ; 27.05,12.576 29.726,9.9 42.1,9.9 44.1,11.9 44.1,16.6
SCL2: J4.2 R10.1 U5.21 | length 70.2
  Top Layer w0.254: R10.1@23.55,30.3 v1(25.4,30.3) 25.4,28.2 26.05,27.55 U5.21@26.05,24.816 ; v1(26.518,37.088) 31.6,42.17 31.6,57.6 v1(33,59) ; v1(33.1,62.8) 33.1,83.897 J4.2@36.53,87.327
  Bottom Layer w0.254: v1(25.4,30.3) 24.2,31.5 24.2,34.77 v1(26.518,37.088) ; v1(33,59) 33,62.647 33.1,62.747 v1(33.1,62.8)
SDA1: R22.1 U3.8 U5.43 U7.6 U8.1 U9.6 | length 58.1
  Top Layer w0.254: 27.55,14.054 U5.43@27.55,16.384 ; 27.553,14.047 27.553,13.047 v1(30.1,10.5) ; R22.1@31.4,8.25 v1(31.4,9.2) 43.2,9.2 45.6,11.6 U7.6@45.6,16.175 ; R22.1@31.627,8.323 R22.1@31.627,8.373 ; v1(44.864,20.428) cw(c45.054,20.597) 44.8,20.597 U8.1@44.8,24.6 45.6,24.6 45.95,24.95 U9.6@50.15,24.95 ; U9.6@50.271,24.95 51.433,23.787 53.387,23.787 53.9,24.3 53.9,27.361 52.515,28.746 U3.8@52.515,32.75
  Bottom Layer w0.254: v1(30.1,10.5) v1(31.4,9.2) ; v1(44.864,20.428) 45.6,19.692 v1(45.6,15.2)
SDA2: J4.1 R11.1 U5.22 | length 69
  Top Layer w0.254: R11.1@23.55,28.9 v1(24.45,28.9) ; v1@24.488,28.863 v1(24.45,28.9) ; U5.22@25.55,24.816 25.55,27.25 24.45,28.35 v1(24.45,28.9) ; v1(25.67,37.77) 30.7,42.8 30.7,43.5 30.7,55.6 30.7,57.9 v1(31.8,59) ; v1(32,62.8) 32,85.337 J4.1@33.99,87.327
  Bottom Layer w0.254: v1(24.45,28.9) 23.1,30.25 23.1,35.2 v1(25.67,37.77) ; v1(31.8,59) 31.8,59.053 32,59.253 v1(32,62.8)
SPI1_MISO: R29.1 R39.2 U5.16 U6.17 U10.2 | length 55
  Top Layer w0.254: R39.2@6.2,56.5 8.3,56.5 v1(11.1,53.7) ; v1(11.1,50.6) 11.112,50.612 13.227,50.612 13.353,50.738 13.541,50.55 14.25,50.55 15,49.8 15,38.9 13.672,37.572 13.672,37.274 U10.2@13.533,37.135 ; U10.2@13.055,37.135 U10.2@13.533,37.135 ; R29.1@23.55,31.8 v1(25.9,31.8) 25.9,31.853 25.802,31.951 25.802,31.998 24.8,33 17.3,33 13.684,36.616 13.684,36.996 13.545,37.135 U10.2@13.533,37.135 ; v1(28.4,31.9) 28.453,31.9 28.551,31.802 28.598,31.802 29.475,30.925 29.475,29.275 28.55,28.35 U5.16@28.55,24.842 ; U5.16@28.55,24.842 28.537,24.829 U5.16@28.55,24.816 U5.16@28.55,24.842
  Bottom Layer w0.254: v1(11.1,50.6) v1(11.1,53.7) ; v1(25.9,31.8) 28.247,31.8 28.347,31.9 v1(28.4,31.9)
SPI1_MOSI: R38.2 U5.17 U6.14 U10.5 | length 45.8
  Top Layer w0.254: R38.2@6.2,54 6.2,53.875 7.5,52.575 U6.14@13.24,52.575 14.825,52.575 v1(16.2,51.2) ; v1(16.2,48.6) 16.2,38.2 19.716,34.685 U10.5@20.345,34.595 24.605,34.595 28.05,31.15 28.7,30.5 28.7,29.5 28.05,28.85 U5.17@28.05,24.816
  Bottom Layer w0.254: v1(16.2,48.6) v1(16.2,51.2)
SPI1_SCK: R33.2 U5.15 U6.15 U10.6 | length 45.6
  Top Layer w0.254: R33.2@6.3,51.5 6.725,51.925 U6.15@13.24,51.925 13.353,51.812 14.079,51.812 17.375,48.516 17.375,38.45 ccw(c17.629,38.45) 17.449,38.27 19.855,35.865 U10.6@20.345,35.865 25.435,35.865 25.735,35.865 30.2,31.4 30.2,28.9 29.05,27.75 U5.15@29.05,24.816
Storage_CS: R36.1 U5.14 U10.1 | length 38.2
  Top Layer w0.254: R36.1@11.1,39.95 11.1,39 11.695,38.405 U10.1@12.565,38.405 ; U10.1@13.055,38.405 U10.1@12.565,38.405 ; v1(19.9,28.2) 10.5,28.2 9.4,29.3 9.4,35.24 U10.1@12.565,38.405 ; U5.14@29.55,24.816 29.55,27.15 v1(30.2,27.8)
  Bottom Layer w0.254: v1(19.9,28.2) 20.3,27.8 v1(30.2,27.8)
SWCLK: J3.4 R25.1 U5.37 | length 43.7
  Top Layer w0.254: U5.37@24.55,16.384 24.55,9.35 28.8,5.1 36.9,5.1 40.15,8.35 51.75,8.35 52.65,7.45 J3.4@52.65,2.4
SWDIO: J3.2 R24.1 U5.34 | length 41.9
  Top Layer w0.254: U5.34@23.084,18.85 23.096,18.837 23.794,18.837 24.183,18.448 24.183,9.116 28.707,4.592 36.992,4.592 40,7.6 47.45,7.6 R24.1@47.75,7.3 ; J3.2@47.65,2.4 R24.1@47.65,6.9
SWO: J3.6 U5.39 | length 47.4
  Top Layer w0.254: U5.39@25.55,16.384 25.55,13.45 25.8,13.2 25.8,8.7 28.9,5.6 36.799,5.6 39.999,8.8 55.5,8.8 57.65,6.65 J3.6@57.65,2.4
Temp_int: R30.2 R41.2 U5.18 U6.1 | length 76.9
  Top Layer w0.254: R41.2@6.2,61.5 6.2,61.625 6.673,62.098 6.798,62.098 7.6,62.9 v1(21.1,62.9) ; v1(16.8,53.3) 16.8,51.309 19.321,48.788 20.047,48.788 U6.1@20.16,48.675 20.047,48.675 19.321,48.675 18.849,48.675 18.7,48.526 18.7,45.92 21.248,43.372 23.628,43.372 25.052,41.948 25.052,37.348 32.525,29.875 R30.2@34.4,29.875 v1(34.4,28.2) ; U5.18@27.55,24.816 27.55,26.69 27.55,29.267 27.862,29.579 27.862,30.062 v1(27.9,30.1)
  Bottom Layer w0.254: v1(16.8,53.3) 21.1,57.6 v1(21.1,62.9) ; v1(27.9,30.1) 32.1,30.1 34,28.2 v1(34.4,28.2)
TPS_VIN: C1.2 R49.2 U2.4
USART_RX: J5.10 U5.31 | length 88.1
  Top Layer w0.254: v1(13.4,20.5) 14.5,21.6 19.346,21.6 20.596,20.35 U5.31@23.084,20.35 ; v1(46.9,10.1) 62.6,10.1 64.5,12 64.5,23.6 J5.10@61.1,27
  Bottom Layer w0.254: v1(13.4,20.5) 13.4,16.1 22.1,7.4 44.2,7.4 v1(46.9,10.1)
USART_TX: J5.08 U5.30 | length 82.9
  Top Layer w0.254: v1(13.4,21.7) 13.453,21.7 13.853,22.1 19.7,22.1 20.95,20.85 U5.30@23.084,20.85 ; v1(47,12) 47.047,12 47.247,11.8 62.1,11.8 63.3,13 63.3,22.7 61.876,24.124 61.782,24.124 61.445,24.46 J5.08@61.1,24.46
  Bottom Layer w0.254: v1@13.42,21.7 13.453,21.7 13.551,21.602 13.598,21.602 14.3,20.9 14.3,16.8 22.7,8.4 43.4,8.4 v1(47,12)
USB_DN: U5.32 U11.6 | length 15
  Top Layer w0.222: U11.6@11.055,17.25 11.771,17.25 12.572,16.449 13.5,16.449 ccw(c13.5,17.2) 14.251,17.2 14.251,18.795 ; 14.251,18.797 cw(c15.222,18.797) 15.102,19.761 ; 15.104,19.761 cw(c15.222,18.797) 15.214,19.768 15.856,19.775 17.478,19.775 22.16,19.775 22.236,19.85 U5.32@23.084,19.85
USB_DP: U5.33 U11.5@11.055,15.35 | length 14.9
  Top Layer w0.222: U11.5@11.055,15.35 11.771,15.35 12.521,16.1 13.5,16.1 ccw(c13.5,17.2) 14.6,17.2 14.6,18.795 ; 14.6,18.797 cw(c15.222,18.797) 15.146,19.415 cw(c15.222,18.797) 15.217,19.419 ; 15.218,19.419 15.858,19.425 17.623,19.425 22.16,19.425 22.236,19.35 U5.33@23.084,19.35
pads on no net: Ext_MAX.3 J1.A8 J1.B8 J5.01 J5.02 J5.03 J5.05 J5.11 J5.12 J5.13 J5.15 J5.16 J5.17 J5.18 J5.19 J5.21 J5.22 J5.23 J5.24 J5.26 J5.27 J5.28 J5.29 J5.31 J5.32 J5.33 J5.35 J5.36 J5.38 J5.40 U5.2 U5.5 U5.6 U5.12 U5.13 U5.38 U5.41 U6.20 U7.2 U7.3 U7.9 U7.13 U7.15 U7.16

## Polygon pours and split planes (outlines as drawn)
GND on Bottom Layer "GND_M_B" (solid, remove dead copper, pour order 72): 62.5,98.4 cw(c62.5,95.387) 65.513,95.395 cw(c63.531,96.253) 65.5,95.366 65.5,2.3 cw(c63.7,2.3) 63.7,0.5 2.7,0.5 cw(c2.7,2.7) 0.5,2.7 0.607,95.7 0.6,95.9 cw(c3.018,95.982) 3.1,98.4
GND on Bottom Layer "NONET_L-01_P-001" (solid, pour order 65): 33.5,16.4 41,16.4 41,21.7 33.5,21.7
GND on Bottom Layer "NONET_L-01_P-001" (solid, pour order 70): 0.3,11.3 6.3,11.3 6.3,13.6 0.3,13.6
GND on Bottom Layer "NONET_L-01_P-001" (solid, pour order 69): 0.3,18.9 6.3,18.9 6.3,21.2 0.3,21.2
NetQ1_3 on Bottom Layer "NONET_L-01_P-001" (solid, pour order 66): 18.75,84.9 18.85,84.9 18.85,81.7 12.75,81.7 12.75,83.1 12.85,83.2 17.55,83.2 17.55,84.9 18.85,84.9 19.05,84.7 19.15,84.7
GND on Bottom Layer "R44 GND" (solid, pour order 59): 29.687,86.5 29.687,79.8 19.513,79.8 19.587,86.5
3.3V on Bottom Layer "NONET_L-01_P-001" (solid, pour order 67): 41,49.5 46.45,49.5 46.45,53.935 41,53.935
NetC2_2 on Bottom Layer "NONET_L-01_P-001" (solid, pour order 64): 44.85,56.035 44.85,54.535 38.85,54.535 38.05,55.335 37.95,55.335 37.95,56.035 38.75,56.035
GND on Bottom Layer "NONET_L-01_P-001" (solid, pour order 60): 37.75,57.535 37.75,56.635 38.95,56.635 38.95,58.235 44.85,58.235 44.85,56.235 32.35,56.235 32.35,58.335 35.75,58.335 35.85,58.235 35.85,56.635 36.95,56.635 36.95,57.535
TPS_VIN on Bottom Layer "NONET_L-01_P-001" (solid, pour order 62): 32.4,54.535 32.4,56.035 36.75,56.035 36.75,55.335 36.45,55.335 35.65,54.535
NetD1_1 on Bottom Layer "NONET_L-01_P-001" (solid, pour order 68): 32.8,53.75 34,53.75 34,48.4 32.8,48.4
GND on Top Layer "GND_M_B" (solid, remove dead copper, pour order 71): 7.201,98.334 2.596,98.269 ccw(c2.803,96.028) 0.557,96.173 ccw(c6.24,93.458) 0.5,96.051 0.5,2.7 ccw(c2.7,2.7) 2.7,0.5 63.7,0.5 ccw(c63.7,2.3) 65.5,2.3 65.5,96.3 65.5,96.6 ccw(c63.766,96.6) 63.766,98.334
GND on Top Layer "NONET_L-01_P-001" (solid, pour order 74): 33.5,21.7 40.5,21.7 41.3,20.9 41.3,17 40.538,16.238 33.5,16.238
GND on Top Layer "NONET_L-01_P-001" (solid, pour order 58): 45.5,16.7 46.8,16.7 46.8,18.1 45.5,18.1
GND on Top Layer "NONET_L-01_P-001" (solid, pour order 61): 30.35,86.9 30.25,87 19.35,87 19.35,80 19.65,79.7 30.35,79.7
3.3V on Top Layer "NONET_L-01_P-001" (solid, pour order 75): 46.45,53.935 41,53.935 41,49.5 46.45,49.5
NRST on Top Layer "NONET_L-01_P-001" (solid, pour order 57): 15.2,13.1 15.2,9.868 17.9,9.868 17.9,13.1
3.3V on 3.3V layer (split plane): 63.217,98.482 63.433,98.454 63.645,98.407 63.852,98.342 64.053,98.258 64.246,98.158 64.429,98.041 64.602,97.909 64.762,97.762 64.909,97.602 65.041,97.429 65.158,97.246 65.258,97.053 65.342,96.852 65.407,96.645 65.454,96.433 65.482,96.217 65.491,96.016 65.49,96 65.49,3 65.491,2.984 65.482,2.783 65.454,2.567 65.407,2.355 65.342,2.148 65.258,1.947 65.158,1.754 65.041,1.571 64.909,1.398 64.762,1.238 64.602,1.091 64.429,0.959 64.246,0.842 64.053,0.742 63.852,0.658 63.645,0.593 63.433,0.546 63.217,0.518 63.016,0.509 63,0.51 3,0.51 2.984,0.509 2.783,0.518 2.567,0.546 2.355,0.593 2.148,0.658 1.947,0.742 1.754,0.842 1.571,0.959 1.398,1.091 1.238,1.238 1.091,1.398 0.959,1.571 0.842,1.754 0.742,1.947 0.658,2.148 0.593,2.355 0.546,2.567 0.518,2.783 0.509,2.984 0.51,3 0.51,96 0.509,96.016 0.518,96.217 0.546,96.433 0.593,96.645 0.658,96.852 0.742,97.053 0.842,97.246 0.959,97.429 1.091,97.602 1.238,97.762 1.398,97.909 1.571,98.041 1.754,98.158 1.947,98.258 2.148,98.342 2.355,98.407 2.567,98.454 2.783,98.482 2.984,98.491 3,98.49 63,98.49 63.016,98.491
GND on GND Layer (split plane): 63.217,98.482 63.433,98.454 63.645,98.407 63.852,98.342 64.053,98.258 64.246,98.158 64.429,98.041 64.602,97.909 64.762,97.762 64.909,97.602 65.041,97.429 65.158,97.246 65.258,97.053 65.342,96.852 65.407,96.645 65.454,96.433 65.482,96.217 65.491,96.016 65.49,96 65.49,3 65.491,2.984 65.482,2.783 65.454,2.567 65.407,2.355 65.342,2.148 65.258,1.947 65.158,1.754 65.041,1.571 64.909,1.398 64.762,1.238 64.602,1.091 64.429,0.959 64.246,0.842 64.053,0.742 63.852,0.658 63.645,0.593 63.433,0.546 63.217,0.518 63.016,0.509 63,0.51 3,0.51 2.984,0.509 2.783,0.518 2.567,0.546 2.355,0.593 2.148,0.658 1.947,0.742 1.754,0.842 1.571,0.959 1.398,1.091 1.238,1.238 1.091,1.398 0.959,1.571 0.842,1.754 0.742,1.947 0.658,2.148 0.593,2.355 0.546,2.567 0.518,2.783 0.509,2.984 0.51,3 0.51,96 0.509,96.016 0.518,96.217 0.546,96.433 0.593,96.645 0.658,96.852 0.742,97.053 0.842,97.246 0.959,97.429 1.091,97.602 1.238,97.762 1.398,97.909 1.571,98.041 1.754,98.158 1.947,98.258 2.148,98.342 2.355,98.407 2.567,98.454 2.783,98.482 2.984,98.491 3,98.49 63,98.49 63.016,98.491

## Keep-outs
Top Layer:
  lines w0.15: 33.5,16.232 33.5,18.4 ; 33.5,16.238 40.538,16.238 41.3,17 41.3,18.75 41.3,19.35 41.3,20.9 40.5,21.7 33.7,21.7 33.5,21.7 33.5,19.9

## Other copper
Top Layer:
  pour cut-out: 6.5,21.6 6.673,21.427 6.673,10.573 6.5,10.4 0.3,10.4 0.3,21.6
Bottom Layer:
  region net NetL1_1: 36.95,54.035 36.95,51.635 34.75,51.635 34.75,54.035
  region net NetL1_1: 35.85,54.235 35.65,54.035 35.85,54.035
  region net NetL1_1: 36.95,54.035 36.95,55.035 36.85,55.035 35.85,54.035
  region net NetL1_1: 35.85,54.035 35.85,54.235 35.65,54.035 36.95,55.335 37.25,55.335
  region net NetL1_1: 37.25,55.335 36.95,55.035 36.95,54.035
  region net NetL1_2: 37.55,54.035 37.55,55.235 37.45,55.335
  region net NetL1_2: 37.75,55.435 37.55,55.435 37.45,55.335 37.75,55.035 37.75,54.035 37.55,54.035 37.75,54.235 37.75,55.235
  region net NetL1_1: 37.25,55.335 36.95,55.035 36.85,55.035
  region net NetL1_2: 37.45,55.335 37.5,55.385 37.45,55.435 37.45,55.335 37.5,55.285
  region net NetL1_2: 37.65,55.435 37.55,55.435 37.45,55.335
  region net NetL1_1: 36.95,55.285 37.05,55.185 37.2,55.335 37.25,55.335 37.25,56.035 36.95,56.035 36.95,55.335
  region net NetL1_2: 37.55,55.235 37.55,54.435 37.75,54.235 37.75,55.035
  region net NetL1_2: 38.65,54.035 37.75,54.035 37.75,54.935
  region net NetL1_2: 38.65,54.035 37.75,54.935 37.75,54.235 37.75,55.435
  region net NetL1_2: 37.75,54.235 37.55,54.435 37.55,54.035
  region net NetL1_2: 37.55,51.635 39.75,51.635 39.75,54.035 37.55,54.035

## Silkscreen, mask and mechanical layers (free items; w line width, h text height)
Top Overlay:
  drawing of 53 lines, arcs and shapes, not listed
  text "SCL2" at 36.232,88.852 h1.5 r90
  text "SDA2" at 34.532,88.752 h1.5 r90
  text "RTD_N" at 44.852,88.319 h1.5
  text "RTD_P" at 49.852,88.319 h1.5
  text "Force" at 54.852,88.068 h1.5
  text "NeuTronic" at 27.754,55.316 h6
  text "DNP-15" at 31.457,2.868 h1.52
Bottom Overlay:
  text "DNP-44" at 26.437,78.352 h1.52
  text "DNP-2" at 5.355,74.352 h1.52
  text "DNP-49" at 30.04,56.968 h1.52
  text "DNP-3" at 51.06,53.769 h1.52
  text "3V3" at 42.003,47.725 h2
  text "DNP-12" at 16.434,18.252 h1.52
  text "nRST" at 56.532,6.848 h1.5 r90
  text "SWO" at 58.632,6.648 h1.5 r90
  text "SWD" at 48.232,6.448 h1.5 r90
  text "GND" at 51.632,6.348 h1.5 r90
  text "SCK" at 54.132,6.248 h1.5 r90
  text "3V3" at 45.631,5.748 h1.5 r90
Mechanical 1:
  circle w0.013: c18,66 r2.5
  circle w0.013: c38.013,54.493 r1.5
  circle w0.013: c38.013,54.493 r1.5
  circle w0.013: c48,66 r2.5
  circle w0.013: c38.013,76.493 r1.5
  circle w0.013: c61,94 r1.5
  circle w0.013: c61,5 r1.5
  circle w0.013: c51,15 r2.5
  circle w0.013: c51,25.5 r3
  circle w0.013: c5,94 r1.5
  circle w0.013: c33,66 r2.5
  circle w0.013: c5,5 r1.5
  circle w0.013: c5,27 r1.5
  circle w0.013: c48.013,65.993 r2.5
  circle w0.013: c61.013,4.993 r1.5
  circle w0.013: c5.013,75.993 r1.5
  circle w0.013: c61.013,75.993 r1.5
  circle w0.013: c18.013,65.993 r2.5
  circle w0.013: c33.013,65.993 r2.5
  circle w0.013: c48.013,65.993 r2.5
  circle w0.013: c18.013,65.993 r2.5
  circle w0.013: c33.013,65.993 r2.5
  circle w0.013: c61.013,4.993 r1.5
  lines w0.013: -0.013,95.499 -0.013,95.512 ; 62.975,-0.007 ccw(c62.975,3.031) 66.013,3.031 ; 66.013,95.987 66,96 ; 33.863,61.343 33.863,61.643 ; 33.863,61.343 33.863,61.643 ; 33.863,61.343 34.663,61.343 ; 33.863,61.343 34.663,61.343 ; 33.863,61.643 34.663,61.643 ; 33.863,61.643 34.663,61.643 ; 34.663,61.343 34.663,61.643 ; 34.663,61.343 34.663,61.643 ; 36.893,61.343 36.893,61.643 ; 36.893,61.343 36.893,61.643 ; 36.893,61.343 38.393,61.343 ; 36.893,61.343 38.393,61.343 ; 36.893,61.643 38.393,61.643 ; 36.893,61.643 38.393,61.643 ; 38.393,61.343 38.393,61.643 ; 38.393,61.343 38.393,61.643 ; 66,96 ccw(c63,96) 63,99 3,99 ccw(c3,96) 0,96 0,3 ccw(c3,3) 3,0 63,0 ccw(c63,3) 66,3 66,96 ; 0.85,11.85 1.65,11.85 1.65,12.15 0.85,12.15 0.85,11.85 ; 0.85,20.49 0.85,20.79 1.65,20.79 1.65,20.49 0.85,20.49 ; 3.88,11.85 3.88,12.15 5.38,12.15 5.38,11.85 3.88,11.85 ; 3.88,20.49 3.88,20.79 5.38,20.79 5.38,20.49 3.88,20.49 ; 33.863,69.958 34.663,69.958 34.663,70.258 33.863,70.258 33.863,69.958 ; 33.863,69.983 34.663,69.983 34.663,70.283 33.863,70.283 33.863,69.983 ; 36.893,69.958 38.393,69.958 38.393,70.258 36.893,70.258 36.893,69.958 ; 36.893,69.983 38.393,69.983 38.393,70.283 36.893,70.283 36.893,69.983
  text "SOLIDWORKS Educational Product." at -32.887,-53.087 h4.83
  text "For Instructional Use Only." at -33,-57.77 h4.83

## Dimensions
62.975,-0.007 to 63,99 on Mechanical 1
66,3 to 0,3 on Mechanical 1

## Text inside footprints (layer, text, board x,y; h text height)
BT1: Bottom Overlay "+" at 64.971,79.148 h1.15
J1: Bottom 3D Body "PCB EDGE" at -0.37,21.615 h0.81 r270
U5: Top 3D Body "*" at 31.9,16.7 h1.27 r180; Top Overlay "*" at 32.4,17.1 h1.27 r180
U10: Top 3D Body "*" at 14.071,37.846 h1.27; Top Overlay "*" at 12.484,38.811 h1.27